# Altium PCB WMCB-V1.PcbDoc
Units mm, origin at the board's own origin, x right, y up, seen from the top; angles counter-clockwise.
Board outline 35 x 45 mm, 2 copper layers (TopLayer, BottomLayer); 27 components, 42 nets, 131 pads, 149 vias.
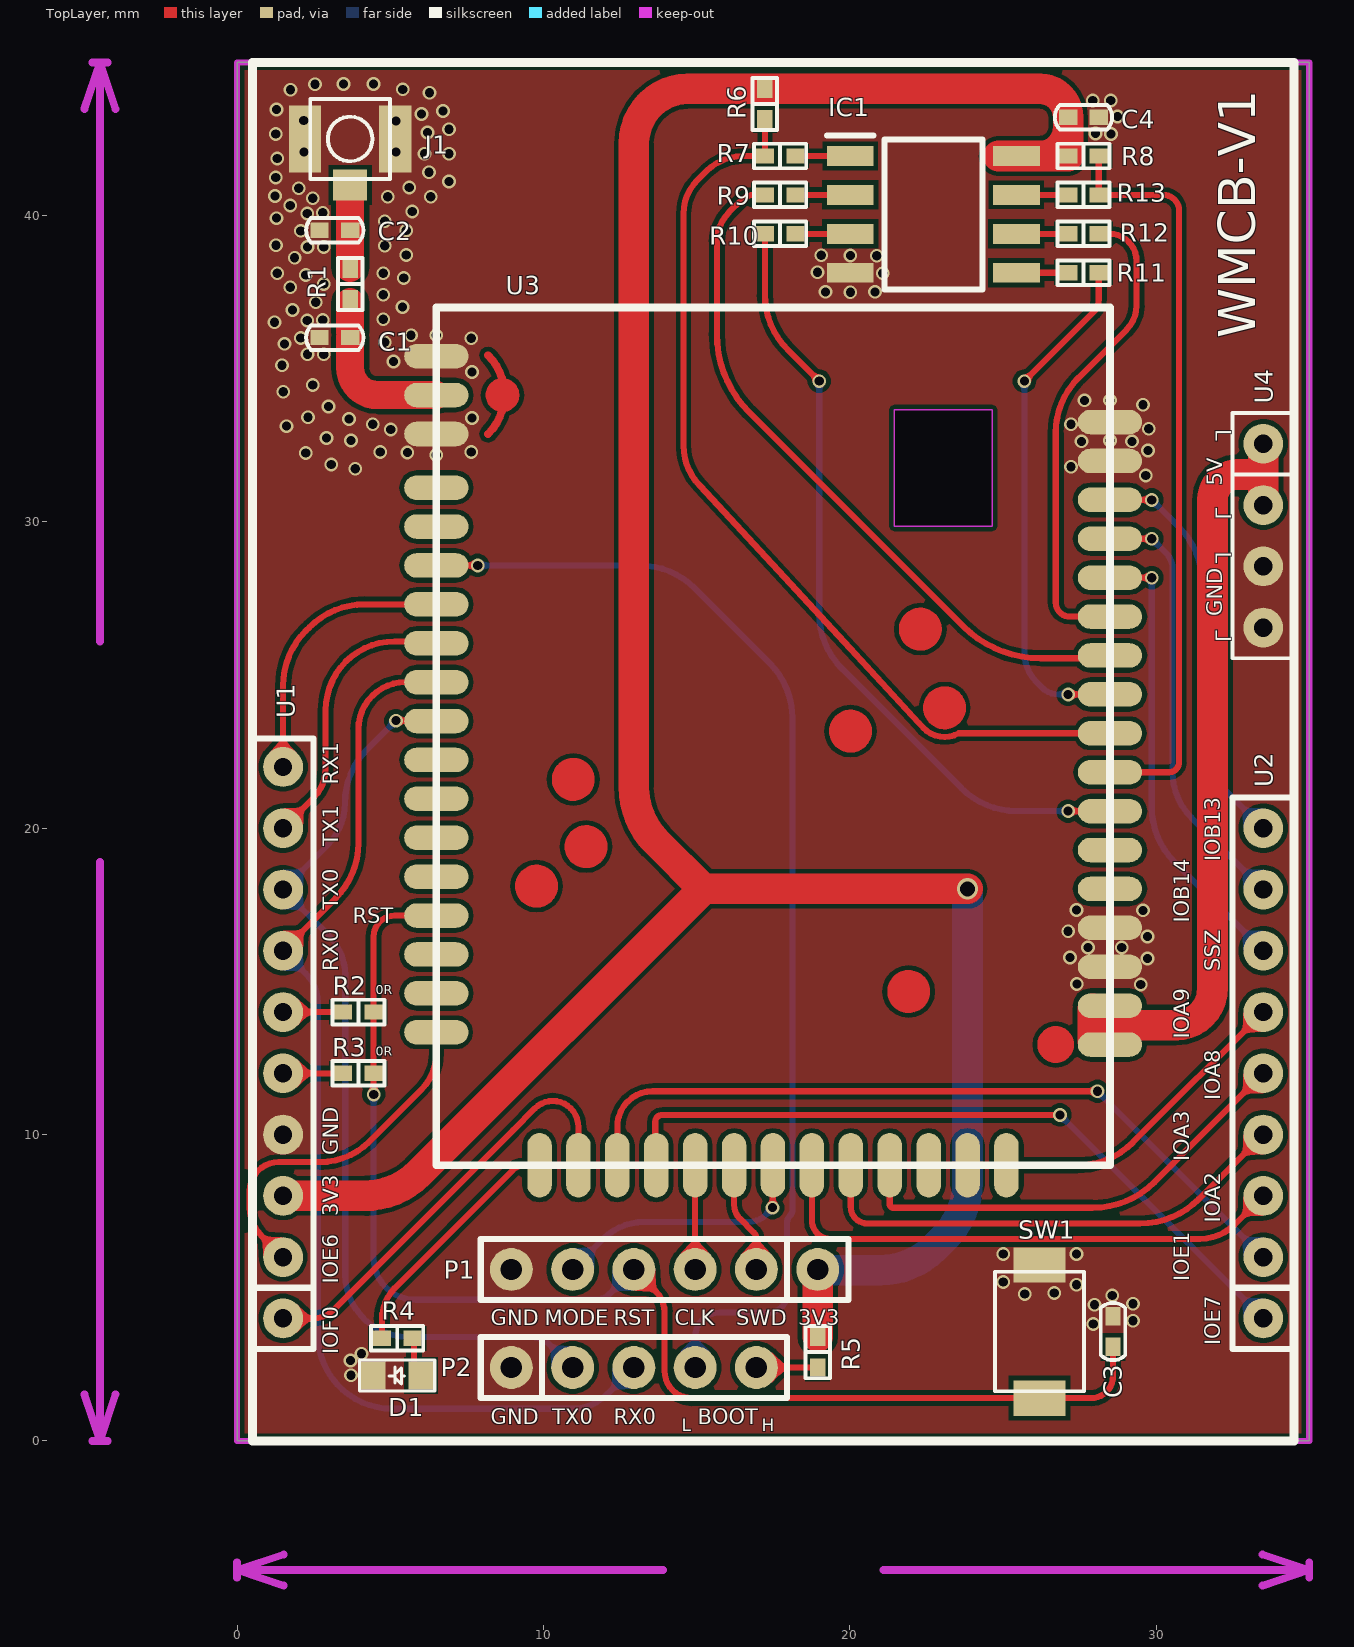
[diagram p0: TopLayer view]
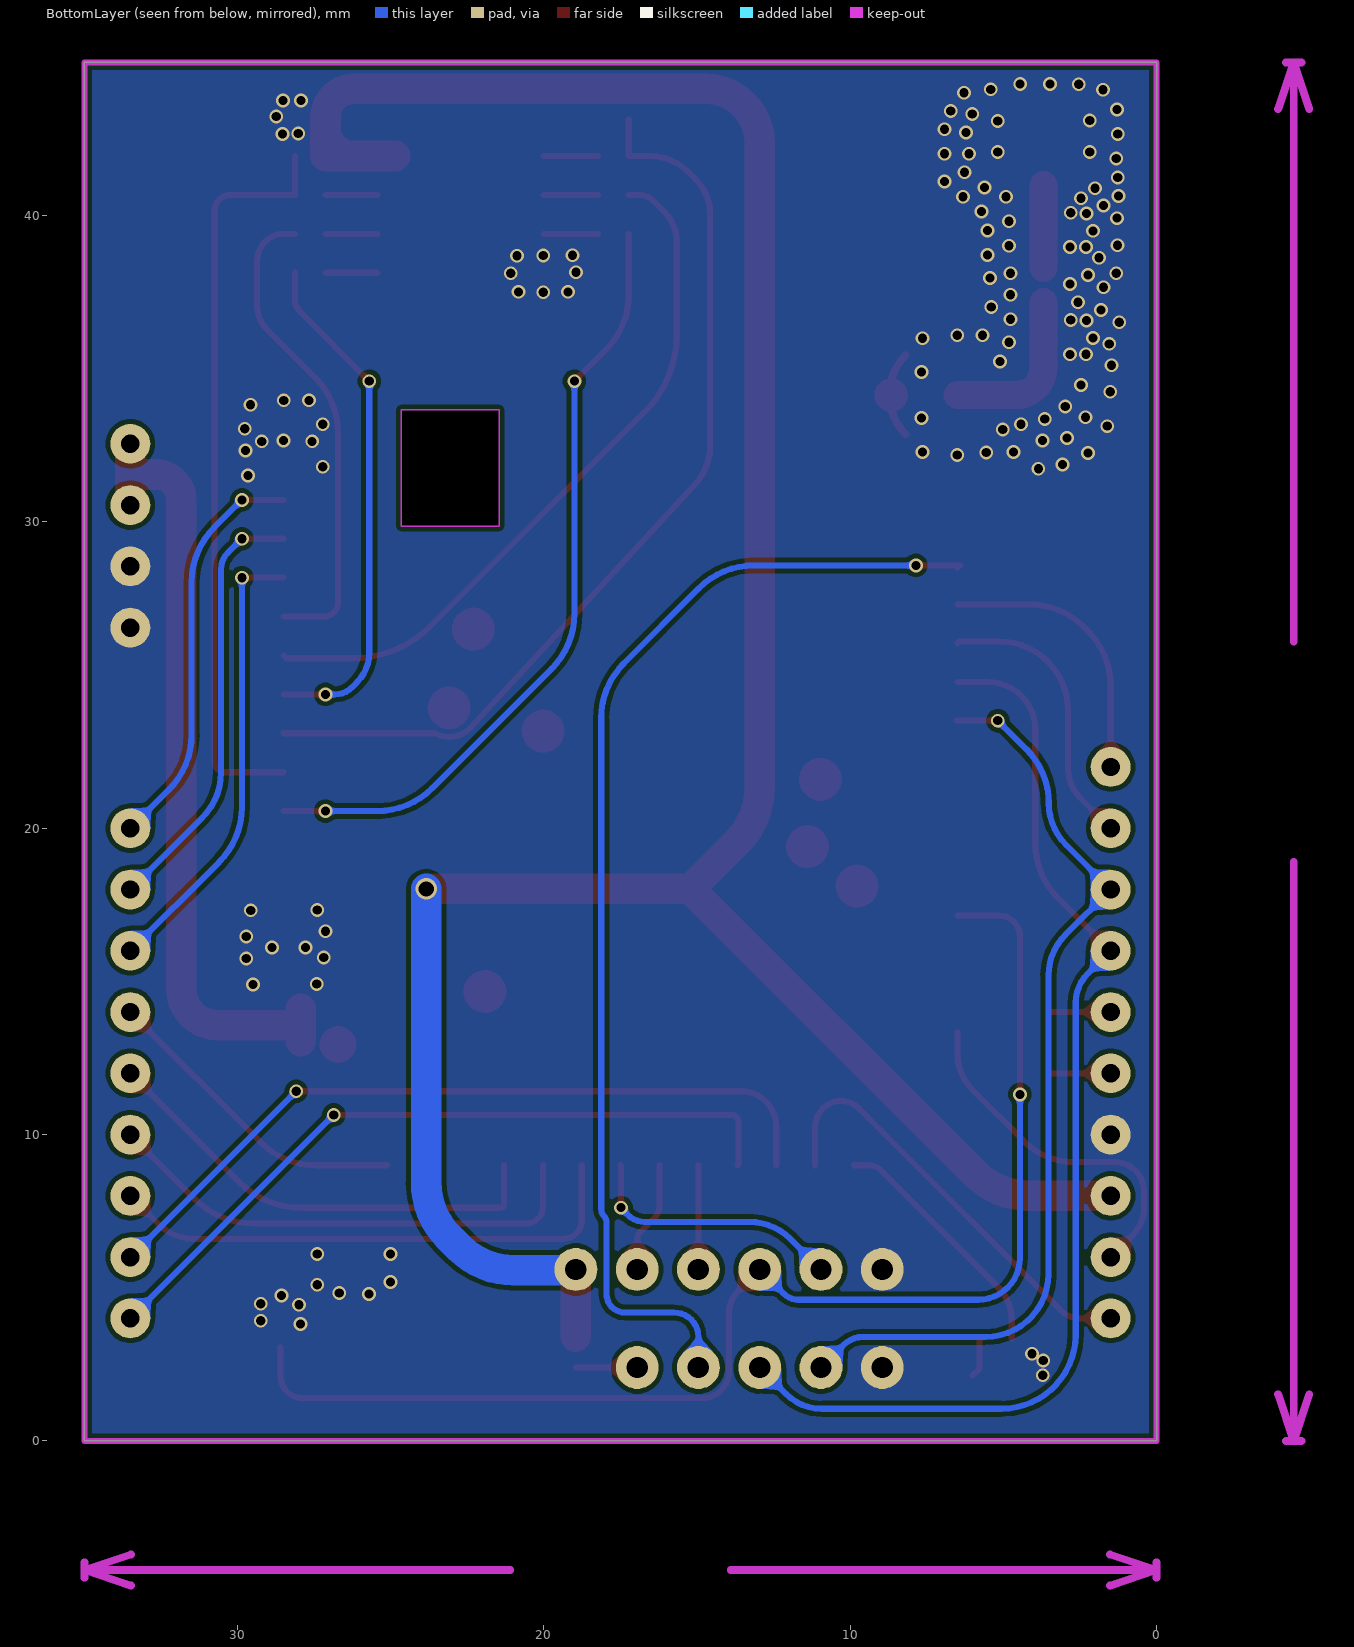
[diagram p1: BottomLayer view, seen from below]

## Layer stack, top to bottom
TopSolder: solder mask 0.0102, Solder Resist, Dk 3.5
TopLayer: signal copper 0.0711
Dielectric2: prepreg 0.32, FR-4, Dk 4.8
BottomLayer: signal copper 0.0711
BottomSolder: solder mask 0.0102, Solder Resist, Dk 3.5

## Board outline
0,0 0,45 35,45 35,0
cut-out: 21.455,33.66 24.655,33.66 24.655,29.86 21.455,29.86

## Design rules (kind name [scope] priority, off if disabled: settings)
Clearance [All] p1: gap=0.15 ignorepadtopadclearanceinfootprint=FALSE except(0: Arc-Hole Track-Hole SMDPad-Hole THPad-Hole Via-Hole Fill-Hole Poly-Hole Region-Hole Text-Hole)
ComponentClearance [All] p1 off: gap=0.254 collisioncheckmode=3 verticalgap=0.254 showdistances=FALSE
DiffPairsRouting DiffPairsRouting_9 [All] p1: maxlimit=0.254 minlimit=0.191 mostfreqgap=0.254 toplayer_minwidth=0.381 toplayer_maxwidth=0.381 toplayer_prefwidth=0.381 bottomlayer_minwidth=0.381 bottomlayer_maxwidth=0.381 bottomlayer_prefwidth=0.381 maxuncoupledlength=12.7
DiffPairsRouting DiffPairsRouting_8 [InDifferentialPair('NewDifferentialPair9')] p2: maxlimit=0.203 minlimit=0.203 mostfreqgap=0.203 toplayer_minwidth=0.381 toplayer_maxwidth=0.381 toplayer_prefwidth=0.381 bottomlayer_minwidth=0.381 bottomlayer_maxwidth=0.381 bottomlayer_prefwidth=0.381 maxuncoupledlength=12.7
DiffPairsRouting DiffPairsRouting_7 [InDifferentialPair('NewDifferentialPair8')] p3: maxlimit=0.203 minlimit=0.203 mostfreqgap=0.203 toplayer_minwidth=0.381 toplayer_maxwidth=0.381 toplayer_prefwidth=0.381 bottomlayer_minwidth=0.381 bottomlayer_maxwidth=0.381 bottomlayer_prefwidth=0.381 maxuncoupledlength=12.7
DiffPairsRouting DiffPairsRouting_6 [InDifferentialPair('NewDifferentialPair7')] p4: maxlimit=0.203 minlimit=0.203 mostfreqgap=0.203 toplayer_minwidth=0.381 toplayer_maxwidth=0.381 toplayer_prefwidth=0.381 bottomlayer_minwidth=0.381 bottomlayer_maxwidth=0.381 bottomlayer_prefwidth=0.381 maxuncoupledlength=12.7
DiffPairsRouting DiffPairsRouting_5 [InDifferentialPair('NewDifferentialPair6')] p5: maxlimit=0.203 minlimit=0.203 mostfreqgap=0.203 toplayer_minwidth=0.381 toplayer_maxwidth=0.381 toplayer_prefwidth=0.381 bottomlayer_minwidth=0.381 bottomlayer_maxwidth=0.381 bottomlayer_prefwidth=0.381 maxuncoupledlength=12.7
DiffPairsRouting DiffPairsRouting_4 [InDifferentialPair('NewDifferentialPair5')] p6: maxlimit=0.203 minlimit=0.203 mostfreqgap=0.203 toplayer_minwidth=0.381 toplayer_maxwidth=0.381 toplayer_prefwidth=0.381 bottomlayer_minwidth=0.381 bottomlayer_maxwidth=0.381 bottomlayer_prefwidth=0.381 maxuncoupledlength=12.7
DiffPairsRouting DiffPairsRouting_3 [InDifferentialPair('NewDifferentialPair4')] p7: maxlimit=0.203 minlimit=0.203 mostfreqgap=0.203 toplayer_minwidth=0.381 toplayer_maxwidth=0.381 toplayer_prefwidth=0.381 bottomlayer_minwidth=0.381 bottomlayer_maxwidth=0.381 bottomlayer_prefwidth=0.381 maxuncoupledlength=12.7
DiffPairsRouting DiffPairsRouting_2 [InDifferentialPair('NewDifferentialPair3')] p8: maxlimit=0.203 minlimit=0.203 mostfreqgap=0.203 toplayer_minwidth=0.381 toplayer_maxwidth=0.381 toplayer_prefwidth=0.381 bottomlayer_minwidth=0.381 bottomlayer_maxwidth=0.381 bottomlayer_prefwidth=0.381 maxuncoupledlength=12.7
DiffPairsRouting DiffPairsRouting_1 [InDifferentialPair('NewDifferentialPair2')] p9: maxlimit=0.203 minlimit=0.203 mostfreqgap=0.203 toplayer_minwidth=0.381 toplayer_maxwidth=0.381 toplayer_prefwidth=0.381 bottomlayer_minwidth=0.381 bottomlayer_maxwidth=0.381 bottomlayer_prefwidth=0.381 maxuncoupledlength=12.7
DiffPairsRouting [InDifferentialPair('NewDifferentialPair1')] p10: maxlimit=0.203 minlimit=0.203 mostfreqgap=0.203 toplayer_minwidth=0.381 toplayer_maxwidth=0.381 toplayer_prefwidth=0.381 bottomlayer_minwidth=0.381 bottomlayer_maxwidth=0.381 bottomlayer_prefwidth=0.381 maxuncoupledlength=12.7
FabricationTestPointUsage TestPointUsage [All] p1: valid=0 allowmultiple=FALSE
FabricationTestpoint Testpoint [(IsPad And (OnTopLayer Or OnBottomLayer))] p1: side=3 testpointundercomponent=TRUE minsize=1.016 maxsize=2.54 preferedsize=1.524 minholesize=0.508 maxholesize=1.016 preferedholesize=0.813 testpointgrid=0.025 allowsidetop=TRUE allowsidebottom=TRUE usegrid=TRUE gridtolerance=0
HoleSize [All] p1: absolutevalues=TRUE maxlimit=5 minlimit=0.025 maxpercent=80.000 minpercent=20.000
HoleToHoleClearance [All] p1 off: gap=0.254 allowstackedmicrovias=TRUE
MinimumSolderMaskSliver [All] p1 off: minsoldermaskwidth=0.254
PolygonConnect [All] p1: connectstyle=Direct reliefconductorwidth=0.6 reliefentries=4 polygonreliefangle="90 Angle" airgapwidth=0.254
RoutingVias [All] p1: holewidth=0.3 width=0.5 viastyle="Through Hole" minholewidth=0.3 minwidth=0.453 maxholewidth=5 maxwidth=5
SilkToSilkClearance [All] p1 off: silktosilkclearance=0.254
SilkToSolderMaskClearance SilkscreenOverComponentPads [IsPad] p1 off: minsilkscreentomaskgap=0.254 clearancetoexposedcopper=TRUE
SolderMaskExpansion [All] p1: expansion=0.077 istentingtop=FALSE
Width [All] p1: maxlimit=5 minlimit=0.15 preferedwidth=0.203
21 further rules are at their usual default settings.

## Components (designator, comment, footprint, x,y, rotation, side; value= is the part's Value field where it differs from the comment)
C1 "0.1uF/NC" 0402C 3.19,36.018 r0 top
C2 "0.1uF/NC" 0402C 3.19,39.518 r0 top
C3 "0.1uF" 0402C 28.595,3.572 r90 top
C4 "1uF" 0402C 27.63,43.214 r180 top
D1 "Green_LED" LED0603--0.4mm 5.228,2.136 r180 top
IC1 "IS62WVS2568FBLL-20NLI" SOIC127P600X175-8N 22.73,40.039 r0 top
J1 "I-PEX-CON" I-PEX-CON 3.69,41 r270 top
P1 "6PIN-200" 6PIN-200 18.955,5.597 r180 top
P2 "5Pin-200" 5pin-200 8.955,2.397 r0 top
R1 "0R" 0402 3.69,37.768 r90 top
R2 "0R" 0402 3.96,14 r0 top
R3 "0R" 0402 3.96,12 r0 top
R4 "220R" 0402 5.228,3.352 r180 top
R5 "1K" 0402 18.955,2.897 r270 top
R6 "NC" 0402 17.23,43.641 r270 top
R7 "10k" 0402 17.73,41.944 r0 top
R8 "10k" 0402 27.63,41.944 r180 top
R9 "22R" 0402 17.73,40.674 r180 top
R10 "22R" 0402 17.73,39.404 r0 top
R11 "22R" 0402 27.63,38.134 r180 top
R12 "22R" 0402 27.63,39.404 r180 top
R13 "22R" 0402 27.63,40.674 r180 top
SW1 "Push  Button" Button_2pin-3*4*2MM 26.195,3.572 r270 top value=Switch-SMD-6x6mm
U1 "10PIN-200" 10PIN-200 1.5,4 r90 top
U2 "9PIN-200" 9PIN-200 33.5,4 r90 top
U3 "WS7300-915" WS7300-915 17.5,23 r0 top
U4 "4PIN-200" 4PIN-200 33.5,32.55 r270 top value=MicroUSB

## Footprints (in the part's own frame and the unit in brackets; to place one, negate y for a bottom-side part, rotate by r counter-clockwise, add the part's x,y. Pads: shape width x height; smd on the part's side, far side on the other; paste and mask are expansions set on the pad)
4PIN-200 [mm]
  round 1.3 hole 0.6: 1(0,0) 2(2,0) 3(4,0) 4(6,0)
  silkscreen extent -1,-1 7,1
5pin-200 [mm]
  round 1.4 hole 0.7: 1(0,0) 2(2,0) 3(4,0) 4(6,0) 5(8,0)
  silkscreen extent -1,-1 9,1
6PIN-200 [mm]
  round 1.4 hole 0.7: 1(0,0) 2(2,0) 3(4,0) 4(6,0) 5(8,0) 6(10,0)
  silkscreen extent -1,-1 11,1
9PIN-200 [mm]
  round 1.3 hole 0.6: 1(0,0) 2(2,0) 3(4,0) 4(6,0) 5(8,0) 6(10,0) 7(12,0) 8(14,0) 9(16,0)
  silkscreen extent -1,-1 17,1
10PIN-200 [mm]
  round 1.3 hole 0.6: 1(0,0) 2(2,0) 3(4,0) 4(6,0) 5(8,0) 6(10,0) 7(12,0) 8(14,0) 9(16,0) 10(18,0)
  silkscreen extent -1,-1 18.92,1
0402 [mm]
  rect 0.6x0.5 smd: 1(-0.5,0) 2(0.5,0)
  silkscreen extent -0.85,-0.4 0.85,0.4
0402C [mm]
  rect 0.6x0.5 smd: 1(-0.5,0) 2(0.5,0)
  silkscreen extent -0.94,-0.4 0.94,0.4
Button_2pin-3*4*2MM [mm] "Button_2pin-3*4*2MM"
  rect 1.15x1.7 smd: 1(2.175,0) 2(-2.175,0)
  silkscreen extent -1.95,-1.45 1.95,1.45
I-PEX-CON [mm]
  rect 1x1.1 smd: 1(0,0)
  rect 2.2x1.05 smd: 2(-1.5,1.475) 2(-1.5,-1.475)
  silkscreen extent -2.8,-1.3 -0.2,1.3
LED0603--0.4mm [mm] "LED0603--0.4mm"
  rect 0.8x0.9 smd: 1(-0.775,0) 2(0.775,0)
  silkscreen extent -1.23,-0.5 1.23,0.5
SOIC127P600X175-8N [mm]
  rect 1.525x0.65 smd: 1(-2.712,1.905) 2(-2.712,0.635) 3(-2.712,-0.635) 4(-2.712,-1.905) 5(2.712,-1.905) 6(2.712,-0.635) 7(2.712,0.635) 8(2.712,1.905)
  silkscreen extent -3.47,-2.45 1.6,2.58, body extent -3,-2.45 3,2.45, height 1.75
WS7300-915 [mm]
  oval 2.1x0.8 smd: 1(-10.995,12.41) 2(-10.995,11.14) 3(-10.995,9.87) 4(-10.995,8.12) 5(-10.995,6.85) 6(-10.995,5.58) 7(-10.995,4.31) 8(-10.995,3.04) 9(-10.995,1.77) 10(-10.995,0.5) 11(-10.995,-0.77) 12(-10.995,-2.04) 13(-10.995,-3.31) 14(-10.995,-4.58) 15(-10.995,-5.85) 16(-10.995,-7.12) 17(-10.995,-8.39) 18(-10.995,-9.66) 32(10.995,-10.06) 33(10.995,-8.79) 34(10.995,-7.52) 35(10.995,-6.25) 36(10.995,-4.98) 37(10.995,-3.71) 38(10.995,-2.44) 39(10.995,-1.17) 40(10.995,0.1) 41(10.995,1.37) 42(10.995,2.64) 43(10.995,3.91) 44(10.995,5.18) 45(10.995,6.45) 46(10.995,7.72) 47(10.995,8.99) 48(10.995,10.26)
  oval 0.8x2.1 smd: 19(-7.625,-14) 20(-6.355,-14) 21(-5.085,-14) 22(-3.815,-14) 23(-2.545,-14) 24(-1.275,-14) 25(-0.005,-14) 26(1.265,-14) 27(2.535,-14) 28(3.805,-14) 29(5.075,-14) 30(6.345,-14) 31(7.615,-14)
  TopLayer circle w0.5: c-8.835,11.14 r0.3
  TopLayer circle w0.7: c4.425,-8.33 r0.35
  TopLayer circle w0.7: c-7.725,-4.89 r0.35
  TopLayer circle w0.7: c-6.525,-1.405 r0.35
  TopLayer circle w0.7: c2.525,0.17 r0.35
  TopLayer circle w0.7: c-6.105,-3.6 r0.35
  TopLayer circle w0.7: c4.805,3.5 r0.35
  TopLayer circle w0.7: c5.595,0.93 r0.35
  TopLayer circle w0.6: c9.225,-10.06 r0.3
  TopLayer lines w0.254: -9.305,9.87 ccw(c-10.59,11.155) -9.305,12.44
  KeepOutLayer region: 3.955,6.86 7.155,6.86 7.155,10.66 3.955,10.66
  silkscreen extent -10.99,-14 11,14

## Part data
C1 C2 C4: library part CAP, "Capacitor"
C3: library part "Cap Semi", "Capacitor (Semiconductor SIM Model)", LatestRevisionDate=17-Jul-2002, LatestRevisionNote="Re-released for DXP Platform.", PackageReference=C1206, Published=8-Jun-2000, Publisher="Altium Limited"
D1: library part LED, Manufacturer=Citizen, Manufacturer's Part Number=CL-170G-CD-T, Old Part Number=4317000, Package Height=1.1mm, Part Number=41100017000, VALUE_ALLEGRO=Red_LED, Bottom=20, Cost=0.48, FPLIST=mot/0805LED,dig/0805led, PCB_dir=90.000000, PCB_x=46.095000, PCB_y=6.420000, Right=40
IC1: "Integrated Circuit", Manufacturer_Name="Integrated Silicon Solution Inc.", Mouser2 Part Number=870-WVS2568FBLL20NLI, Datasheet Link=https://componentsearchengine.com//IS62WVS2568FBLL-20NLI.pdf, Height=1.75mm, Manufacturer_Part_Number=IS62WVS2568FBLL-20NLI, Mouser2 Price/Stock=https://www.mouser.com/Search/Refine.aspx?Keyword=870-WVS2568FBLL20NLI
J1: library part CON2, "Connector"
P1: "Pin Header", LatestRevisionDate=17-Jul-2002, LatestRevisionNote="Re-released for DXP Platform.", Publisher="Altium Limited"
P2: library part PIN5
R1 R2 R3 R4 R5 R6 R7 R8 R9 R10 R11 R12 R13: library part "Res Semi", "Semiconductor Resistor", LatestRevisionDate=17-Jul-2002, LatestRevisionNote="Re-released for DXP Platform.", PackageReference=AXIAL-0.5, Published=8-Jun-2000, Publisher="Altium Limited"
SW1: library part SW1, "Push Button"
U4: library part CON4, "Connector"

## Via types
v1: diameter 0.45, hole 0.3, TopLayer to BottomLayer, tented both sides, 148 vias
v2: diameter 0.7, hole 0.5, TopLayer to BottomLayer, tented both sides, 1 vias

## Nets (pads, with @x,y where several pads share a name; then routed paths per layer and width w, separated by ;. In a path a pad name is that pad's centre, name@x,y a point inside that pad or via, vN(x,y) a via of type N, cw(c..) or ccw(c..) an arc to the next point about the centre after c; other vN are vias at no path point)
3V3: C4.2 IC1.8 P1.1 R5.1 R6.1 R8.2 U1.3 | length 90.6
  TopLayer w1: U1.3 4.15,8 ccw(c4.15,10.54) 5.946,8.744 15.222,18.02 ; R5.1 P1.1@18.955,5.513 ; P1.1 P1.1@18.955,5.513 ; P1.1@18.962,5.52 P1.1@18.955,5.513 ; v2(23.845,18.02) 15.222,18.02 ; IC1.8@24.856,41.944 IC1.8 IC1.8@26.203,41.944 ; 27.13,42.871 cw(c26.203,42.871) IC1.8@26.203,41.944 ; 15.222,18.02 13.699,19.543 cw(c15.495,21.339) 12.955,21.339 12.955,42.364 cw(c14.732,42.364) 13.474,43.619 cw(c14.732,42.364) 13.475,43.62 cw(c14.732,42.364) 14.732,44.141 R6.1 26.203,44.141 cw(c26.203,43.214) C4.2 R8.2 IC1.8@26.203,41.944
  BottomLayer w1: P1.1@18.955,5.513 P1.1 18.982,5.57 20.976,5.57 ccw(c20.976,8.11) 22.772,6.314 23.101,6.643 ccw(c21.305,8.439) 23.845,8.439 v2(23.845,18.02)
+5V: U3.32 U3.33 U4.1 U4.2 | length 25.8
  TopLayer w1: U3.32@27.936,13.05 27.936,13.685 ; 27.936,13.485 U3.33@27.936,14.11 ; 28.135,13.575 30.655,13.575 ccw(c30.655,14.76) 31.84,14.76 31.84,30.728 cw(c32.662,30.728) 32.662,31.55 33.5,31.55 ; 33.5,31.48 U4.2 ccw(c33.5,30.62) U4.2@33.57,30.62 ; 33.5,31.58 U4.1 33.54,32.55 cw(c33.54,32.52) U4.1@33.57,32.52
CLK: R12.1 U3.43 | length 15.9
  TopLayer w0.2: R12.1 28.48,39.404 cw(c28.48,38.521) 29.363,38.521 29.363,37.061 cw(c28.257,37.061) 29.038,36.278 27.469,34.709 ccw(c29.265,32.913) 26.725,32.913 26.725,27.369 ccw(c27.184,27.369) 27.184,26.91 U3.43
GND: C1.1 C2.1 C3.2 C4.1 D1.2 IC1.4 J1.2 P1.6 P2.1 SW1.2 U1.4 U3.1 U3.3 U3.34 U3.35 U3.47 U3.48 U4.3 U4.4 | length 0.1
  TopLayer w0.2: U1.4@1.5,9.87 U1.4
  other v1: 3.716,2.142 3.701,2.622 4.065,2.847 27.946,3.814 29.244,3.923 27.991,4.443 29.244,4.476 28.567,4.745 25.712,4.8 26.678,4.827 27.4,5.101 25.009,5.185 25.009,6.105 27.4,6.105 27.414,14.916 29.5,14.899 29.72,15.75 27.19,15.78 27.78,16.11 28.88,16.11 29.72,16.47 27.13,16.64 27.4,17.334 29.57,17.32 29.663,31.517 3.86,31.736 27.22,31.8 3.076,31.877 6.505,32.187 2.24,32.246 5.559,32.262 4.673,32.287 7.643,32.287 29.738,32.333 27.566,32.63 29.21,32.63 3.72,32.656 28.5,32.66 2.92,32.736 5.02,33.016 29.764,33.041 1.61,33.126 4.43,33.19 27.22,33.19 3.651,33.359 7.673,33.391 2.32,33.416 2.981,33.769 29.576,33.824 27.667,33.968 28.495,33.968 1.51,34.246 2.47,34.466 7.673,34.889 1.47,35.116 1.47,35.116 5.109,35.24 5.109,35.24 2.3,35.472 2.83,35.47 1.546,35.813 4.82,35.866 2.08,36.002 7.643,35.993 5.683,36.093 6.505,36.093 1.22,36.516 2.29,36.572 2.8,36.59 4.77,36.616 1.814,36.918 5.4,37.016 2.567,37.168 4.77,37.416 20.02,37.5 19.21,37.51 20.826,37.51 1.734,37.659 2.83,37.768 5.44,37.966 2.239,38.056 1.315,38.116 4.77,38.116 21.08,38.12 18.95,38.15 1.88,38.622 20.879,38.692 5.52,38.716 19.071,38.707 20.02,38.7 2.3,38.971 2.83,38.97 4.82,39.016 1.274,39.031 2.08,39.501 5.52,39.516 4.82,39.816 1.29,39.916 2.29,40.071 2.8,40.09 5.72,40.136 1.734,40.332 2.47,40.566 4.92,40.616 6.32,40.616 1.24,40.641 2.015,40.891 5.62,40.916 6.92,41.116 1.265,41.241 6.27,41.416 1.315,41.866 6.12,42.016 6.92,42.016 2.183,42.074 5.188,42.079 28.53,42.66 1.265,42.666 28.02,42.68 6.22,42.716 6.92,42.816 5.188,43.089 2.18,43.106 28.74,43.23 6.02,43.316 6.72,43.416 1.29,43.466 27.93,43.76 28.52,43.76 6.285,44.008 1.747,44.108 5.412,44.12 2.544,44.288 3.479,44.294 4.454,44.3
HOLD: R8.1 R13.1 U3.39 | length 24.6
  TopLayer w0.2: R8.1 R13.1 30.242,40.674 cw(c30.242,40.166) 30.75,40.166 30.75,22.154 cw(c30.426,22.154) 30.426,21.83 U3.39
I.MX_IO2: R3.1 U1.5 | length 2
  TopLayer w0.2: U1.5 R3.1
I.MX_IO4: U2.6 U3.31 | length 10.3
  TopLayer w0.2: U3.31 27.448,9 ccw(c27.448,11.54) 29.244,9.744 U2.6
i.MX_IO5: U2.5 U3.28 | length 15.2
  TopLayer w0.2: U3.28 21.305,7.727 ccw(c21.422,7.727) 21.422,7.61 27.931,7.61 ccw(c27.931,10.457) 29.944,8.444 U2.5
i.MX_IO30: R2.1 U1.6 | length 2
  TopLayer w0.2: U1.6 R2.1
i.MX_IO31: U1.1 U3.20 | length 14.2
  TopLayer w0.2: U1.1 2.5,4 ccw(c2.5,4.897) 3.134,4.263 9.013,10.141 9.013,10.146 9.724,10.857 cw(c10.308,10.273) 10.308,11.099 cw(c10.308,10.273) 10.89,10.859 cw(c10.308,10.273) 10.891,10.857 ; 10.892,10.856 cw(c10.276,10.243) 11.145,10.243 11.145,10.242 U3.20
IOA2: U2.3 U3.26 | length 17.4
  TopLayer w0.2: U3.26 18.765,7.623 18.765,7.199 ccw(c19.367,7.199) 19.367,6.597 31.434,6.597 ccw(c31.434,8.196) 32.565,7.065 U2.3
IOA3: U2.4 U3.27 | length 16.2
  TopLayer w0.2: U3.27 20.035,8.279 20.035,7.634 ccw(c20.569,7.634) 20.569,7.1 29.477,7.1 ccw(c29.477,9.811) 31.394,7.894 U2.4
IOB13: U2.9 U3.46 | length 13.4
  TopLayer w0.2: U3.46 v1(29.86,30.72)
  BottomLayer w0.2: v1(29.86,30.72) 30.756,29.824 cw(c28.96,28.028) 31.5,28.028 31.5,23.052 ccw(c34.04,23.052) 32.244,21.256 U2.9
IOB14: U2.8 U3.45 | length 14.2
  TopLayer w0.2: U3.45 v1(29.86,29.45)
  BottomLayer w0.2: v1(29.86,29.45) 30.322,28.988 30.324,28.986 cw(c29.802,28.464) 30.54,28.464 30.54,21.824 ccw(c32.625,21.824) 31.151,20.349 U2.8
IOE1: U2.2 U3.21 | length 25.2
  TopLayer w0.2: U3.21 12.415,10.209 12.415,10.211 cw(c13.567,10.262) 13.567,11.415 v1(28.085,11.415)
  BottomLayer w0.2: v1(28.085,11.415) U2.2
IOE6: U1.2 U3.18 | length 11.6
  TopLayer w0.2: U1.2 0.779,6.721 cw(c1.665,7.61) 0.41,7.61 0.41,8.153 cw(c1.357,8.153) 1.357,9.1 2.691,9.1 ccw(c2.691,11.414) 4.327,9.778 6.016,11.467 ccw(c4.834,12.648) 6.505,12.648 U3.18
IOE7: U2.1 U3.22 | length 24.2
  TopLayer w0.2: U3.22 13.651,9.034 13.651,10.418 cw(c13.873,10.418) 13.873,10.64 v1(26.86,10.64)
  BottomLayer w0.2: v1(26.86,10.64) U2.1
MISO: R9.2 U3.42 | length 23.3
  TopLayer w0.2: 16.453,40.497 16.058,40.102 ccw(c17.012,39.148) 15.663,39.148 15.663,36.119 ccw(c19.241,36.119) 16.711,33.589 23.702,26.598 ccw(c26.232,29.128) 26.232,25.55 28.405,25.55 U3.42 ; 16.454,40.498 cw(c16.88,40.07) 16.88,40.674 R9.2
MOSI: R11.1 U3.41 | length 17
  TopLayer w0.2: v1(25.7,34.595) 27.959,36.854 ; v1(27.13,24.37) U3.41 ; 27.959,36.854 ccw(c27.545,37.268) 28.13,37.268 R11.1
  BottomLayer w0.2: v1(25.7,34.595) 25.7,25.735 ccw(c27.065,25.735) 26.1,24.77 ; 26.1,24.77 26.277,24.593 ccw(c26.815,25.131) 26.815,24.37 v1(27.13,24.37)
NetC1_2: C1.2 R1.1 U3.2 | length 5.3
  TopLayer w0.915: C1.2 3.69,35.038 ccw(c4.588,35.038) 4.588,34.14 5.22,34.14 5.54,34.14 U3.2 ; C1.2@3.69,36.195 R1.1@3.69,37.178
NetC2_2: C2.2 J1.1 R1.2 | length 2.7
  TopLayer w0.915: R1.2@3.69,38.293 C2.2 J1.1
NetD1_1: D1.1 R4.1 | length 1.3
  TopLayer w0.2: R4.1 5.777,3.302 5.777,2.361 D1.1
NetIC1_1: IC1.1 R7.2 | length 1.8
  TopLayer w0.2: R7.2 IC1.1
NetIC1_2: IC1.2 R9.1 | length 1.8
  TopLayer w0.2: R9.1 IC1.2
NetIC1_3: IC1.3 R10.2 | length 1.8
  TopLayer w0.2: R10.2 IC1.3
NetIC1_5: IC1.5 R11.2 | length 1.7
  TopLayer w0.2: IC1.5 R11.2
NetIC1_6: IC1.6 R12.2 | length 1.7
  TopLayer w0.2: IC1.6 R12.2
NetIC1_7: IC1.7 R13.2 | length 1.7
  TopLayer w0.2: IC1.7 R13.2
NetP2_5: P2.5 R5.2 | length 2
  TopLayer w0.2: P2.5 R5.2
SRAM_CS: R6.2 R7.1 U3.40 | length 30.8
  TopLayer w0.2: R6.2 R7.1 16.521,41.944 ccw(c16.521,40.231) 15.309,41.442 15.033,41.165 ccw(c16.142,40.056) 14.573,40.056 14.573,32.49 ccw(c16.429,32.49) 15.11,31.183 15.113,31.181 19.83,26.068 22.258,23.436 22.394,23.289 22.397,23.286 ccw(c23.095,23.93) 23.557,23.1 U3.40
SSZ: U2.7 U3.44 | length 14.9
  TopLayer w0.2: U3.44 v1(29.86,28.18)
  BottomLayer w0.2: v1(29.86,28.18) 29.86,20.692 ccw(c32.4,20.692) 30.604,18.896 U2.7
Wis-BOOT: P2.4 U3.6 | length 37.9
  TopLayer w0.2: U3.6@6.399,28.58 U3.6 ; U3.6@6.505,28.5 U3.6 ; v1(7.855,28.58) U3.6
  BottomLayer w0.2: v1(7.855,28.58) 13.143,28.58 cw(c13.143,26.04) 14.939,27.836 17.386,25.389 cw(c15.59,23.593) 18.13,23.593 18.13,7.554 cw(c17.831,7.554) 18.043,7.343 ; P2.4 14.955,3.397 cw(c15.748,3.397) 15.748,4.19 17.354,4.19 ccw(c17.354,4.791) 17.955,4.791 17.955,7.131 cw(c18.254,7.131) 18.042,7.342
Wis-LED1: R4.2 U3.19 | length 8.1
  TopLayer w0.2: R4.2 4.727,3.96 cw(c6.195,3.96) 5.157,4.997 9.013,8.853 cw(c9.367,8.5) 9.367,9 U3.19
Wis-MODE: P1.5 U3.25 | length 8.6
  TopLayer w0.2: v1(17.48,7.615) 17.487,7.623 17.487,8.992 U3.25
  BottomLayer w0.2: P1.5 11.955,6.597 cw(c13.291,5.261) 13.291,7.15 16.712,7.15 ccw(c16.712,7.918) 17.255,7.375 17.48,7.6 v1(17.48,7.615)
Wis-RESET: C3.1 P1.4 R2.2 R3.2 SW1.1 U3.15 | length 42.8
  TopLayer w0.2: v1(4.46,11.31) R3.2 R2.2 4.46,16.467 cw(c5.143,16.467) 4.66,16.95 4.661,16.951 cw(c5.141,16.47) 5.141,17.15 U3.15 ; P1.4 13.685,4.867 cw(c13.033,4.215) 13.955,4.215 13.955,2.285 ccw(c14.844,2.285) 14.844,1.397 SW1.1 27.877,1.397 ccw(c27.877,2.115) 28.595,2.115 C3.1
  BottomLayer w0.2: v1(4.46,11.31) 4.46,5.972 ccw(c5.822,5.972) 4.859,5.009 ; 4.859,5.009 ccw(c5.822,5.972) 5.822,4.61 11.712,4.61 ccw(c11.712,5.229) 12.15,4.791 P1.4
Wis-RX0: P2.3 U1.7 U3.9 | length 36.7
  TopLayer w0.2: U1.7 3.216,17.716 ccw(c1.42,19.512) 3.96,19.512 3.96,23.233 cw(c5.497,23.233) 4.41,24.32 cw(c5.497,23.233) 5.497,24.77 5.683,24.77 U3.9
  BottomLayer w0.2: U1.7 2.244,15.256 cw(c1.288,14.3) 2.64,14.3 2.64,3.475 2.64,3.474 ccw(c5.064,3.474) 5.064,1.05 5.065,1.05 10.938,1.05 ccw(c10.938,2.668) 12.082,1.524 P2.3
Wis-RX1: U1.10 U3.7 | length 9.2
  TopLayer w0.2: U1.10 1.5,24.648 cw(c4.04,24.648) 2.244,26.444 2.366,26.566 cw(c4.162,24.77) 4.162,27.31 U3.7
Wis-SWCLK: P1.3 U3.23 | length 3.4
  TopLayer w0.2: P1.3 U3.23
Wis-SWD: P1.2 U3.24 | length 3.7
  TopLayer w0.2: U3.24 16.225,7.7 ccw(c16.841,7.7) 16.405,7.265 16.871,6.799 cw(c16.669,6.597) 16.955,6.597 P1.2
Wis-TX0: P2.2 U1.8 U3.10 | length 30.5
  TopLayer w0.2: v1(5.184,23.513) U3.10@6.524,23.513
  BottomLayer w0.2: v1(5.184,23.513) 4.248,22.577 ccw(c6.004,20.82) 3.52,20.82 cw(c1.589,20.82) 2.954,19.454 U1.8 2.981,16.519 cw(c1.656,15.194) 3.53,15.194 3.53,5.452 ccw(c5.585,5.452) 5.585,3.397 9.579,3.397 cw(c9.579,2.489) 10.22,3.131 P2.2
Wis-TX1: U1.9 U3.8 | length 9.3
  TopLayer w0.2: U1.9 2.5,21 ; 2.501,21.001 ccw(c1.558,21.942) 2.89,21.942 2.89,23.847 cw(c5.141,23.847) 3.549,25.439 ; 3.55,25.44 cw(c5.141,23.847) 5.141,26.099 6.446,26.099 U3.8
WP: R10.1 U3.38 | length 25.6
  TopLayer w0.2: R10.1 17.23,37.423 ccw(c19.77,37.423) 17.974,35.626 v1(19.005,34.595) ; v1(27.13,20.56) U3.38
  BottomLayer w0.2: v1(19.005,34.595) 19.005,27.002 ccw(c21.545,27.002) 19.749,25.206 23.651,21.304 ccw(c25.447,23.1) 25.447,20.56 v1(27.13,20.56)
pads on no net: U3.4 U3.5 U3.11 U3.12 U3.13 U3.14 U3.16 U3.17 U3.29 U3.30 U3.36 U3.37

## Polygon pours and split planes (outlines as drawn)
GND on TopLayer "GND_L01_P000" (solid, pour order 0): 0,45 0,0 35,0 35,45
GND on BottomLayer "GND_L02_P002" (solid, pour order 2): 0,45 0,0 35,0 35,45

## Keep-outs
KeepOutLayer:
  lines w0.2: 0,0 0,45 35,45 35,0 0,0
  lines w0.254: -4.983,1.524 -4.475,0 ; -4.983,43.476 -4.475,45 ; -4.729,0 -4.221,0 ; -4.729,45 -4.221,45 ; -4.475,18.901 -4.475,0 ; -4.475,26.099 -4.475,45 ; -3.967,1.524 -4.475,0 ; -3.967,43.476 -4.475,45 ; 0,-4.468 0,-3.96 ; 1.524,-4.722 0,-4.214 ; 1.524,-3.706 0,-4.214 ; 13.901,-4.214 0,-4.214 ; 21.099,-4.214 35,-4.214 ; 33.476,-4.722 35,-4.214 ; 33.476,-3.706 35,-4.214 ; 35,-4.468 35,-3.96
  text "45mm" at -3.561,19.155 h1.52 r90
  text "35mm" at 14.155,-5.129 h1.52

## Silkscreen, mask and mechanical layers (free items; w line width, h text height)
TopOverlay:
  lines w0.293: 28.475,0 34.5,0 34.5,45 0.5,45 0.5,0 30.55,0
  text "WMCB-V1" at 33.241,35.993 h1.2 r90
  text "L" at 31.94,33.027 h0.5 r270
  text "5V" at 32.167,31.181 h0.5 r90
  text "L" at 31.94,30.073 h0.5 r270
  text "L" at 31.94,29.027 h0.5 r270
  text "GND" at 32.167,26.913 h0.5 r90
  text "L" at 31.94,26.073 h0.5 r270
  text "RX1" at 3.305,21.417 h0.5 r90
  text "TX1" at 3.305,19.417 h0.5 r90
  text "IOB13" at 32.088,18.917 h0.5 r90
  text "TX0" at 3.305,17.334 h0.5 r90
  text "IOB14" at 31.088,16.917 h0.5 r90
  text "RST" at 3.778,16.9 h0.5
  text "RX0" at 3.305,15.334 h0.5 r90
  text "SSZ" at 32.088,15.334 h0.5 r90
  text "0R" at 4.53,14.58 h0.3
  text "IOA9" at 31.088,13.125 h0.5 r90
  text "0R" at 4.53,12.58 h0.3
  text "IOA8" at 32.088,11.125 h0.5 r90
  text "GND" at 3.305,9.334 h0.5 r90
  text "IOA3" at 31.088,9.125 h0.5 r90
  text "3V3" at 3.305,7.334 h0.5 r90
  text "IOA2" at 32.088,7.125 h0.5 r90
  text "IOE1" at 31.088,5.209 h0.5 r90
  text "IOE6" at 3.305,5.125 h0.5 r90
  text "GND" at 8.289,3.772 h0.5
  text "MODE" at 10.039,3.772 h0.5
  text "RST" at 12.289,3.772 h0.5
  text "CLK" at 14.289,3.772 h0.5
  text "SWD" at 16.289,3.772 h0.5
  text "3V3" at 18.312,3.772 h0.5
  text "IOE7" at 32.088,3.125 h0.5 r90
  text "IOF0" at 3.305,2.825 h0.5 r90
  text "GND" at 8.289,0.538 h0.5
  text "TX0" at 10.289,0.538 h0.5
  text "RX0" at 12.289,0.538 h0.5
  text "BOOT" at 15.039,0.538 h0.5
  text "L" at 14.522,0.31 h0.4
  text "H" at 17.122,0.31 h0.4